# Altium PCB Pcb.pcbdoc
Units mil, origin at the board's own origin, x right, y up, seen from the top; angles counter-clockwise.
Board outline 5097.03 x 4539 mil, 2 copper layers (Top Layer, Bottom Layer); 99 components, 69 nets, 366 pads, 143 vias.
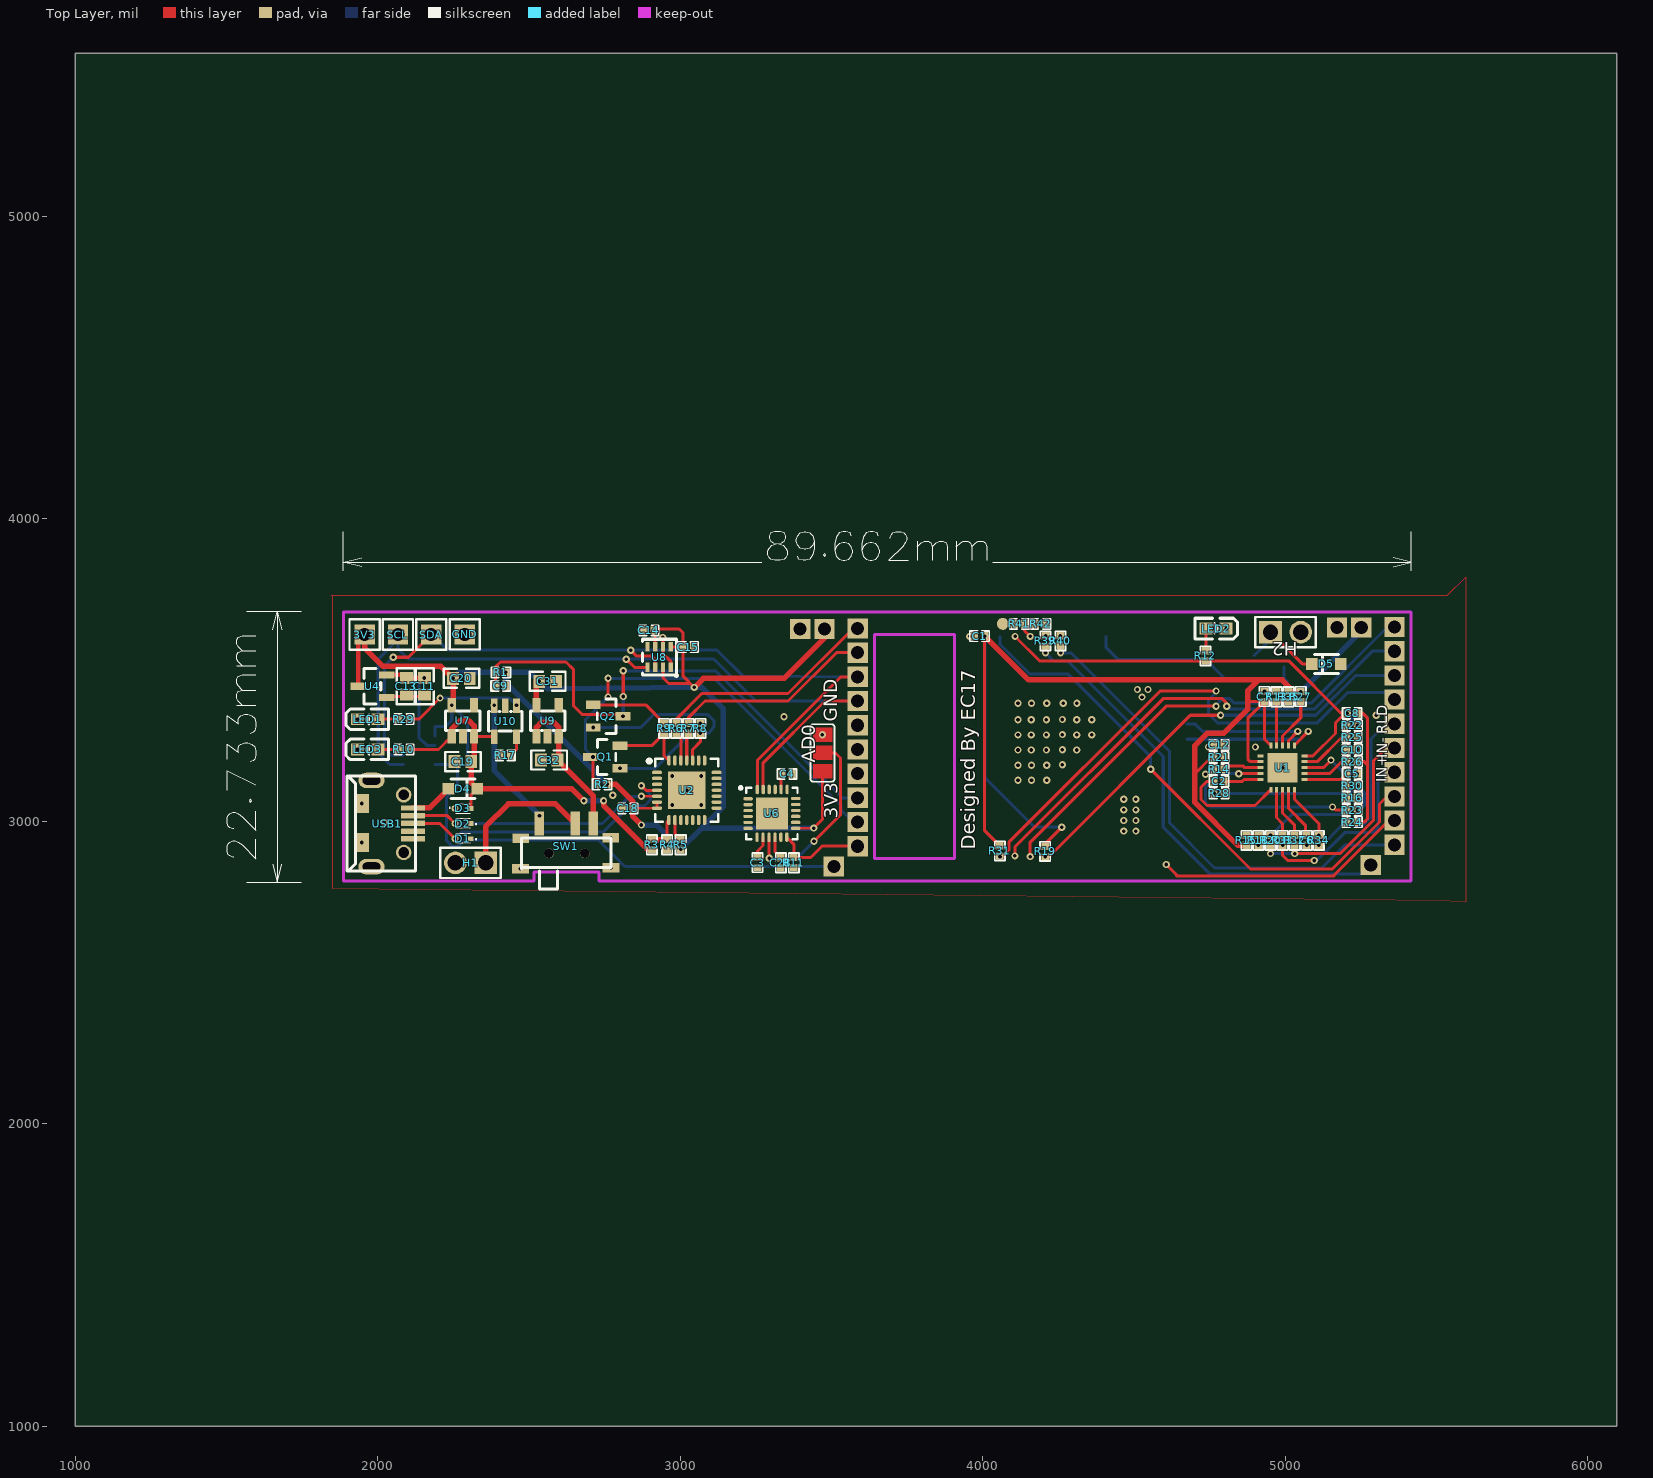
[diagram p0: Top Layer view]
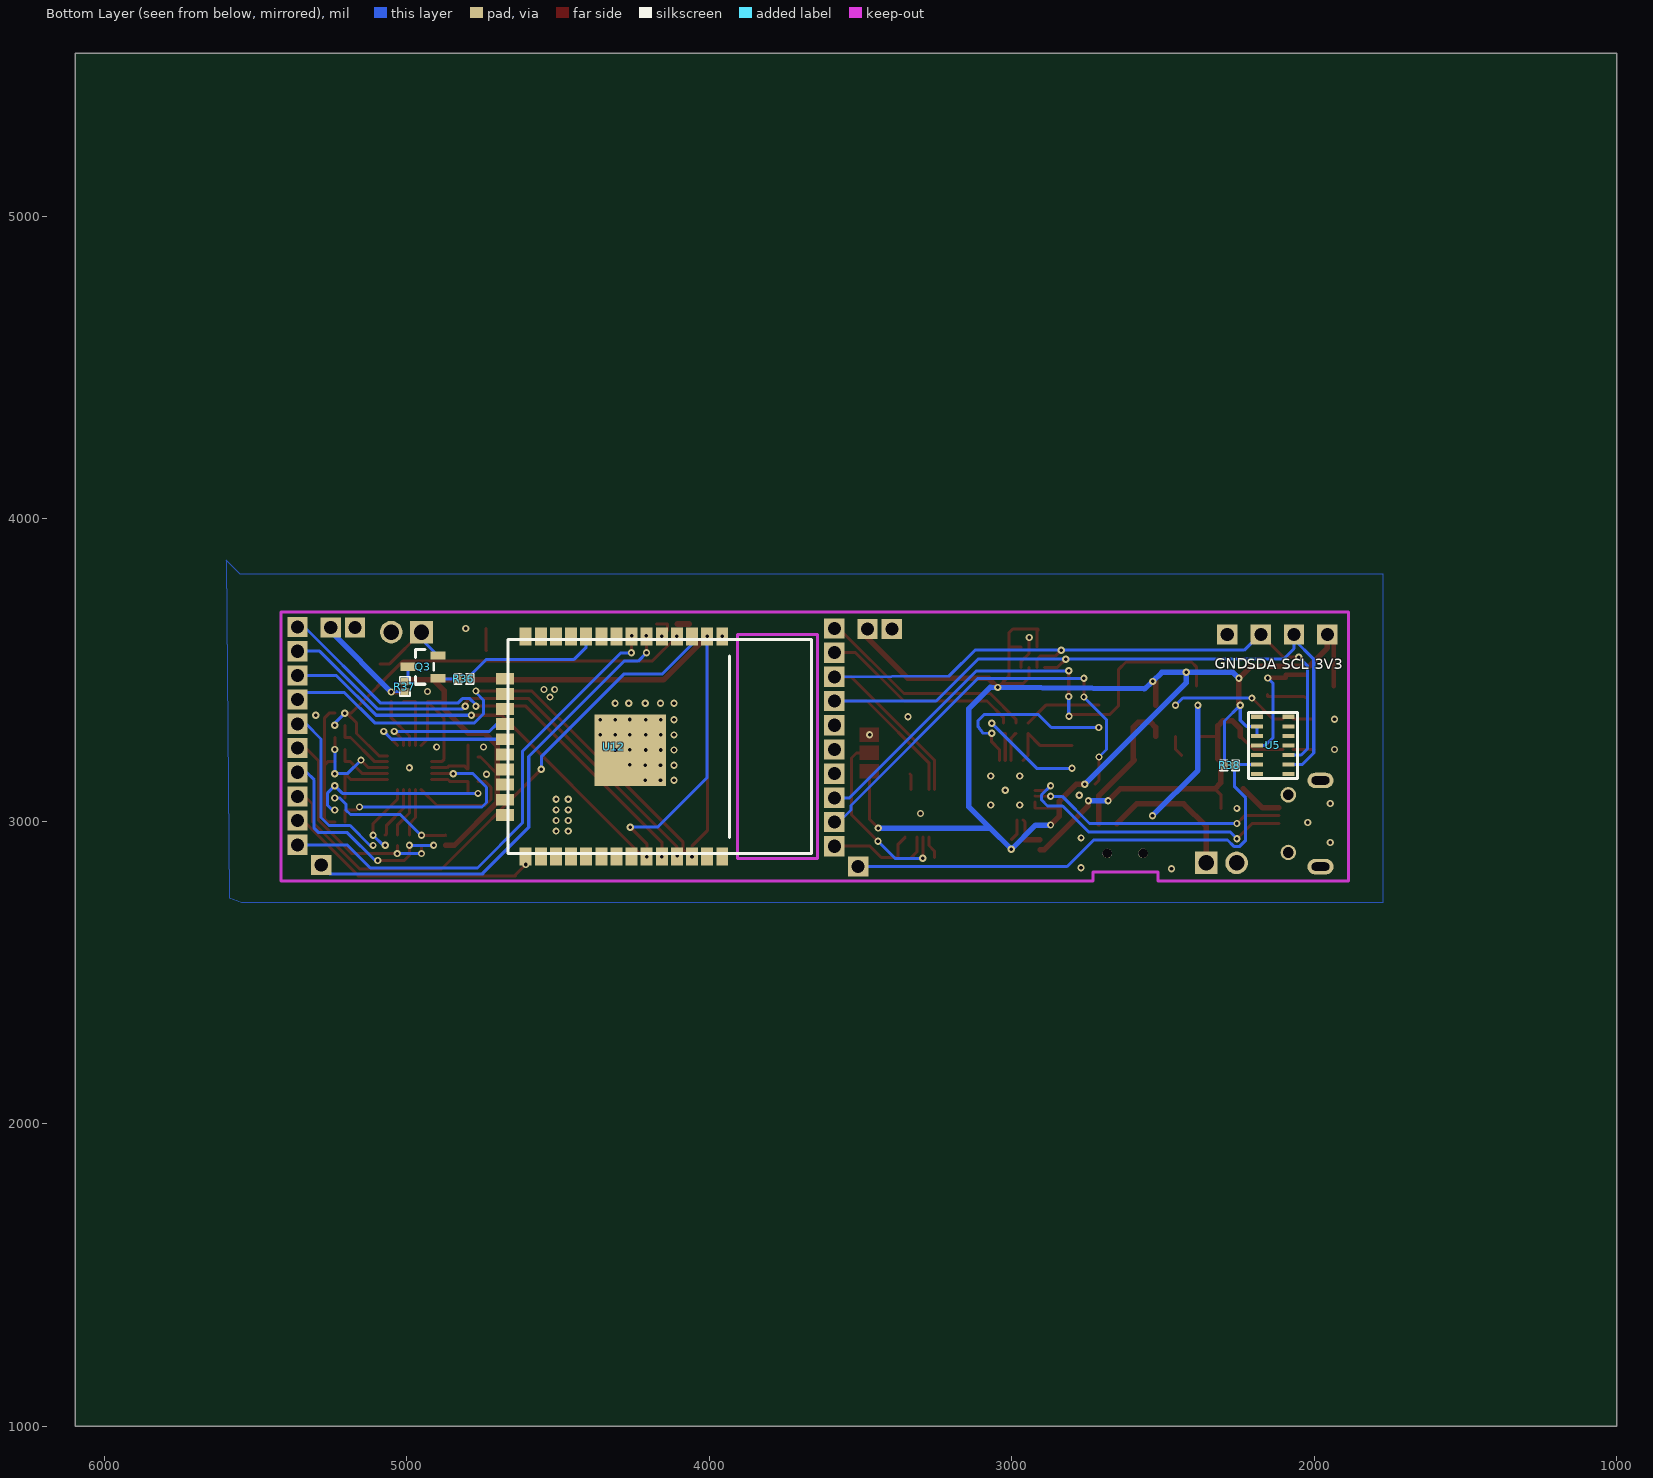
[diagram p1: Bottom Layer view, seen from below]

## Layer stack, top to bottom
Top Layer: signal copper (thickness not stored)
Dielectric: dielectric 12.6, FR-4, Dk 4.8
Bottom Layer: signal copper (thickness not stored)

## Board outline
6097.03,1000 1000,1000 1000,5539 6097.03,5539

## Components (designator, comment, footprint, x,y, rotation, side; value= is the part's Value field where it differs from the comment)
3V3 "3V3" HDR-TH_1P-P2.54-V-M 1957.03,3617 r180 top
AD0 "SJ3" SJ3 3470.93,3225.4 r90 top
C1 "100nF" 0402#1 3990.13,3611.7 r0 top
C2 "0.33uF" 0402#1 4782.03,3131.7 r0 top
C3 "10nF" 0402#1 3256.53,2862.8 r270 top
C4 "2.2nF" 0402#1 3353.53,3155.81 r0 top
C5 "0.33uF" 0402#1 5222.03,3156.7 r0 top
C6 "1nF" 0402#1 5072.03,2936.7 r90 top
C7 "0.1uF" 0402#1 4932.03,3411.7 r270 top
C8 "1.5nf" 0402#1 5222.03,3356.7 r0 top
C9 "100nF" 0402#1 2407.03,3447 r0 top
C10 "10nF" 0402#1 5222.03,3236.7 r180 top
C11 "10uF" 0603 2154.43,3445.8 r270 top
C12 "0.1uF" 0402#1 4782.03,3251.7 r0 top
C13 "10uF" 0603 2095.13,3445.8 r270 top
C14 "0.1uF" 0402#1 2897.03,3630.3 r180 top
C15 "0.1uF" 0402#1 3027.03,3575.3 r0 top
C18 "100nF" 0402#1 2827.03,3042 r180 top
C19 "10uF" 0603 2282.03,3197 r180 top
C20 "10uF" 0603 2277.03,3472 r180 top
C28 "100nF" 0402#1 3333.03,2862.3 r270 top
C31 "47uF" 0603 2562.03,3462 r180 top
C32 "47uF" 0603 2567.03,3202 r180 top
D1 "LESD5D5" LESD5D50CT1G 2282.03,2942 r180 top
D2 "LESD5D5" LESD5D50CT1G 2282.03,2992 r180 top
D3 "LESD5D5" LESD5D50CT1G 2282.03,3042 r0 top
D4 "BAT760-7" SOD-323_L1.8-W1.3-LS2.5-RD 2282.03,3107 r180 top
D5 "BAT760-7" SOD-323_L1.8-W1.3-LS2.5-RD 5137.03,3520 r0 top
GND "GND" HDR-TH_1P-P2.54-V-M 2288.03,3617.3 r180 top
H1 "Header" HDR-2X1/2.54 2307.03,2862 r270 top
H2 "Header" HDR-2X1/2.54 5002.03,3625 r90 top
IN+ "IN+" "PIN HEADER" 5362.03,3161.7 r90 top
IN- "IN-" "PIN HEADER" 5362.03,3241.7 r90 top
LED1 "19-213/R6C-AM2P1VY/3T" LED-0603 1967.03,3337 r0 top
LED2 "19-213/R6C-AM2P1VY/3T" LED-0603 4772.03,3636.7 r180 top
LED3 "19-213/R6C-AM2P1VY/3T" LED-0603 1967.03,3237 r0 top
Q1 "S8050" SOT-23(SOT-23-3)#1 2752.03,3212 r90 top
Q2 "S8050" SOT-23(SOT-23-3)#1 2762.03,3347 r270 top
Q3 "S8050" SOT-23(SOT-23-3)#2 4947.03,3510 r270 bottom
R1 "10K" 0402#1 2407.03,3492 r180 top
R2 "10K" 0402#1 2742.03,3122 r180 top
R3 "22.1K" 0402#1 2907.03,2922 r90 top
R4 "47.5K" 0402#1 2957.03,2922 r90 top
R5 "2K2" 0402#1 3002.03,2922 r90 top
R6 "1K" 0402#1 2987.03,3307 r90 top
R7 "1K" 0402#1 3027.03,3307 r90 top
R8 "10K" 0402#1 3067.03,3307 r90 top
R9 "10K" 0402#1 2947.03,3307 r90 top
R10 "1K" 0402#1 2087.03,3237 r180 top
R11 "10K" 0402#1 3376.03,2862.8 r90 top
R12 "1K" 0402#1 4737.03,3546.7 r90 top
R13 "0" 0402#1 4972.03,3411.7 r90 top
R14 "10M" 0402#1 4782.03,3171.7 r0 top
R15 "0" 0402#1 4872.03,2936.7 r90 top
R16 "DNP" 0402#1 5222.03,3076.7 r180 top
R17 "2K" 0402#1 2422.03,3217 r180 top
R18 "10M" 0402#1 4912.03,2936.7 r90 top
R19 "10K" 0402#1 4207.03,2900 r90 top
R20 "10M" 0402#1 4952.03,2936.7 r90 top
R21 "10M" 0402#1 4782.03,3211.7 r0 top
R22 "1M" 0402#1 5222.03,3316.7 r180 top
R23 "10M" 0402#1 5222.03,3036.7 r0 top
R24 "1M" 0402#1 5222.03,2996.7 r180 top
R25 "100k" 0402#1 5222.03,3276.7 r0 top
R26 "1M" 0402#1 5222.03,3196.7 r180 top
R27 "10K" 0402#1 5052.03,3411.7 r270 top
R28 "10M" 0402#1 4782.03,3091.7 r0 top
R29 "2K2" 0402#1 2087.03,3337 r180 top
R30 "1.4M" 0402#1 5222.03,3116.7 r180 top
R31 "10K" 0402#1 4057.03,2901.7 r90 top
R32 "180k" 0402#1 5032.03,2936.7 r90 top
R33 "180k" 0402#1 4992.03,2936.7 r90 top
R34 "360k" 0402#1 5112.03,2936.7 r90 top
R35 "DNP" 0402#1 5012.03,3411.7 r90 top
R36 "10K" 0402#2 4812.03,3470 r180 bottom
R37 "10K" 0402#2 5007.03,3445 r90 bottom
R38 "472" 0402#2 2280.23,3184 r0 bottom
R39 "0" 0402#1 4208.03,3596.1 r90 top
R40 "0" 0402#1 4257.23,3596.2 r90 top
R41 "47K" 0402#1 4122.03,3652 r0 top
R42 "47K" 0402#1 4192.03,3652 r180 top
RLD "RLD" "PIN HEADER" 5362.03,3321.7 r90 top
SCL "SCL" HDR-TH_1P-P2.54-V-M 2067.03,3617 r180 top
SDA "SDA" HDR-TH_1P-P2.54-V-M 2177.03,3617 r180 top
SW1 "SSSS811101" SSSS811101 2622.03,2917 r0 top
U1 "AD8232" LFCSP_20 4992.03,3176.7 r90 top
U2 "CP2102-GMR" QFN-28_5X5X05P 3022.03,3102 r0 top
U4 "CL9901A18L3M" SOT-23_L2.9-W1.3-P0.95-LS2.4-BR 1982.73,3446 r0 top
U5 "MAX30102EFD+" MAX30102 2137.03,3250.3 r180 bottom
U6 "MPU-6050_C24112" QFN-24_4X4X05P 3303.53,3025.81 r0 top
U7 "TLV70233DBVR(SOT23-5)" SEEED-SOT-23-5 2282.03,3332 r0 top
U8 "BMP280" BMP280_D 2932.03,3540.3 r90 top
U9 "TLV70233DBVR(SOT23-5)" SEEED-SOT-23-5 2562.03,3332 r0 top
U10 "MCP73832T" SOT23-5 2422.03,3330.3 r180 top
U12 "ESP-WROOM-32" ESP-WROOM-32 4317.03,3246.7 r90 bottom
USB1 "micro USBFemale" MICRO-USB-1 2032.03,2992 r180 top
? "" ? 4427.01,3269.5 r0 top
? "" ? 1624.52,3244.5 r0 top
? "" ? 3652.03,3892.15 r0 top

## Footprints (in the part's own frame and the unit in brackets; to place one, negate y for a bottom-side part, rotate by r counter-clockwise, add the part's x,y. Pads: shape width x height; smd on the part's side, far side on the other; paste and mask are expansions set on the pad)
0402#1 [mm]
  rect 0.6x0.65 smd: 1(-0.424,0) 2(0.424,0)
  silkscreen extent -0.82,-0.43 0.81,0.43
0402#2 [mm]
  rect 0.6x0.65 smd: 1(0.424,0) 2(-0.424,0)
  silkscreen extent -0.81,-0.43 0.82,0.43
0603 [mm]
  rect 1x1.1 smd: 1(-0.7,0) 2(0.7,0)
  silkscreen extent -1.5,-0.8 1.5,0.8
BMP280_D [mil]
  rect 32x13.82 smd: 1(-32,-37.2) 2(-32,-11.6) 3(-32,14.4) 4(-32,40) 5(36,40) 6(36,14.4) 7(36,-11.6) 8(36,-37.2)
  silkscreen extent -64,-61 61,56
ESP-WROOM-32 [mil]
  rect 59.1x39.4 smd: 1(364,-359.5) 2(364,-309.5) 3(364,-259.5) 4(364,-209.5) 5(364,-159.5) 6(364,-109.5) 7(364,-59.5) 8(364,-9.5) 9(364,40.5) 10(364,90.5) 11(364,140.5) 12(364,190.5) 13(364,240.5) 14(364,290.5) 25(-364,290.5) 26(-364,240.5) 27(-364,190.5) 28(-364,140.5) 29(-364,90.5) 30(-364,40.5) 31(-364,-9.5) 32(-364,-59.5) 33(-364,-109.5) 34(-364,-159.5) 35(-364,-209.5) 36(-364,-259.5) 37(-364,-309.5) 38(-364,-359.5)
  rect 39.4x59.1 smd: 15(224,359.5) 16(174,359.5) 17(124,359.5) 18(74,359.5) 19(24,359.5) 20(-26,359.5) 21(-76,359.5) 22(-126,359.5) 23(-176,359.5) 24(-226,359.5)
  rect 236.2x236.2 smd: 39(-12,-55.5)
  silkscreen extent -354,-654 354,350
HDR-2X1/2.54 [mm]
  rect 1.9x1.9 hole 1.3: 1(0,1.27)
  round 1.9 hole 1.3: 2(0,-1.27)
  silkscreen extent -1.27,-2.54 1.27,2.54
HDR-TH_1P-P2.54-V-M [mm]
  rect 1.7x1.7 hole 1.1: 1(0,0)
  silkscreen extent -1.27,-1.27 1.27,1.27
LED-0603 [mil]
  rect 43x39 smd: 1(33.5,0) 2(-33.5,0)
  silkscreen extent -72,-34 70,34
LESD5D50CT1G [mil]
  rect 18.9x15.75 smd: 1(-25.98,0) 2(25.98,0)
  silkscreen extent -45,-16 24,16
LFCSP_20 [mil]
  rect 19.7x10 smd: 1(-73,39) 2(-73,20) 3(-73,0) 4(-73,-20) 5(-73,-39) 11(73,-39) 12(73,-20) 13(73,0) 14(73,20) 15(73,39)
  rect 10x19.7 smd: 6(-39,-73) 7(-20,-73) 8(0,-73) 9(20,-73) 10(39,-73) 16(39,73) 17(20,73) 18(0,73) 19(-20,73) 20(-39,73)
  rect 98.4x98.4 smd: PAD(0,0)
MAX30102 [mil]
  rect 40x13.78 smd: 1(52.04,-94.43) 2(52.04,-62.93) 3(52.04,-31.44) 4(52.04,0.06) 5(52.04,31.54) 6(52.04,63.02) 7(52.04,94.5) 8(-51.96,94.5) 9(-51.96,63.02) 10(-51.96,31.54) 11(-51.96,0.06) 12(-51.96,-31.44) 13(-51.96,-62.93) 14(-51.96,-94.43)
  silkscreen extent -81,-109 81,110
MICRO-USB-1 [mm]
  round 1.3 hole 0.9: 0(-1.371,2.431) 0(-1.371,-2.41)
  oval 2.2x1.3 hole 0.7 slot 1.5 at 0 deg: 0(1.329,3.619) 0(1.329,-3.619)
  rect 1.2x1.6 smd: 0(2.14,-1.683) 0(2.156,1.596)
  rect 2x0.45 smd: 1(-2.156,-1.31) 2(-2.156,-0.66) 3(-2.156,-0.01) 4(-2.156,0.64) 5(-2.156,1.29)
  silkscreen extent -2.36,-4 3.4,4
"PIN HEADER" [mm]
  rect 1.7x1.7 hole 1.1: 1(0,0)
QFN-24_4X4X05P [mm]
  oval 0.8x0.28 smd: 1(-2,1.232) 2(-2,0.732) 3(-2,0.231) 4(-2,-0.267) 5(-2,-0.767) 6(-2,-1.267) 13(2,-1.257) 14(2,-0.757) 15(2,-0.257) 16(2,0.241) 17(2,0.742) 18(2,1.242)
  oval 0.28x0.8 smd: 7(-1.245,-2) 8(-0.744,-2) 9(-0.244,-2) 10(0.254,-2) 11(0.754,-2) 12(1.255,-2) 19(1.27,2) 20(0.77,2) 21(0.269,2) 22(-0.229,2) 23(-0.729,2) 24(-1.229,2)
  rect 2.68x2.68 smd: 25(0,-0.013)
  silkscreen extent -2.84,-2.16 2.15,2.35
QFN-28_5X5X05P [mm]
  oval 0.85x0.28 smd: 1(-2.5,1.501) 2(-2.5,1.001) 3(-2.5,0.5) 4(-2.5,0) 5(-2.5,-0.5) 6(-2.5,-1.001) 7(-2.5,-1.501) 15(2.5,-1.501) 16(2.5,-1.001) 17(2.5,-0.5) 18(2.5,0) 19(2.5,0.5) 20(2.5,1.001) 21(2.5,1.501)
  oval 0.28x0.85 smd: 8(-1.501,-2.5) 9(-1.001,-2.5) 10(-0.5,-2.5) 11(0,-2.5) 12(0.5,-2.5) 13(1.001,-2.5) 14(1.501,-2.5) 22(1.501,2.5) 23(1.001,2.5) 24(0.5,2.5) 25(0,2.5) 26(-0.5,2.5) 27(-1.001,2.5) 28(-1.501,2.5)
  rect 3.13x3.13 smd: 29(0,0)
  silkscreen extent -3.3,-2.65 2.65,2.65
SEEED-SOT-23-5 [mil]
  rect 27.2x47.2 smd: 1(-37,-51) 2(0,-51) 3(37,-51) 4(37,51) 5(-37,51)
  silkscreen extent -57,-32 57,32
SJ3 [mil]
  round 0 smd: 1(-60,0) 2(0,0) 3(60,0)
  Top Layer region: -23,31.5 23,31.5 23,-31.5 -23,-31.5
  Top Layer region: -83,31.5 -37,31.5 -37,-31.5 -83,-31.5
  Top Layer region: 37,31.5 83,31.5 83,-31.5 37,-31.5
  silkscreen extent -95,-40 95,40
SOD-323_L1.8-W1.3-LS2.5-RD [mm]
  rect 1x1 smd: 1(-1.2,0) 2(1.2,0)
  silkscreen extent -1,-0.8 1,0.8
SOT23-5 [mil]
  rect 21.7x47.2 smd: 1(-37,-51) 2(0,-51) 3(37,-51) 4(37,51) 5(-37,51)
  silkscreen extent -56,-32 56,32
SOT-23(SOT-23-3)#1 [mm]
  rect 0.7x1.25 smd: 1(-0.95,-1.25) 2(0.95,-1.25) 3(0,1.25)
  silkscreen extent -1.46,-0.9 1.46,0.65
SOT-23(SOT-23-3)#2 [mm]
  rect 0.7x1.25 smd: 1(0.95,1.25) 2(-0.95,1.25) 3(0,-1.25)
  silkscreen extent -1.46,-0.65 1.46,0.9
SOT-23_L2.9-W1.3-P0.95-LS2.4-BR [mm]
  rect 1.3x0.6 smd: 1(1.2,-0.95) 2(1.2,0.95) 3(-1.2,0)
  silkscreen extent -0.7,-1.5 0.7,1.5
SSSS811101 [mm]
  rect 0.8x2 smd: 1(-2.209,1.898) 2(0.791,1.898) 3(2.291,1.898)
  rect 1.4x0.8 smd: 4(-3.793,0.688) 5(3.79,0.697) 6(3.802,-1.812) 7(-3.802,-1.898)
  round 0.8 hole 0.8 unplated: ""(-1.413,-0.597) ""(1.589,-0.599)
  silkscreen extent -3.71,-3.6 3.79,0.7
? [mil]

## Free pads (board coordinates)
  rect 66.93x66.93 hole 43.31: 3(3587.03,3637) 3(5362.03,3641.7) 4(3587.03,3477) 4(5362.03,3481.7) 5(3587.03,3557) 5(5362.03,3561.7) 6(3587.03,2997) 6(5362.03,3001.7) 7(3587.03,3317) 7(5362.03,3321.7) 8(3587.03,3157) 8(5362.03,3161.7) 9(3587.03,3237) 9(5362.03,3241.7) 10(3508.33,2849.9) 10(3587.03,2917) 10(5283.33,2854.6) 10(5362.03,2921.7) 12(3397.03,3635.3) 12(3477.03,3635.3) 12(5172.03,3640) 12(5252.03,3640) 13(3587.03,3077) 13(5362.03,3081.7) 15(3587.03,3397) 15(5362.03,3401.7)
  round 39.4 smd: "0402 Resistor"(4067.03,3652)

## Via types
v1: diameter 24, hole 12, Top Layer to Bottom Layer, tented both sides, 143 vias

## Nets (pads, with @x,y where several pads share a name; then routed paths per layer and width w, separated by ;. In a path a pad name is that pad's centre, name@x,y a point inside that pad or via, vN(x,y) a via of type N, cw(c..) or ccw(c..) an arc to the next point about the centre after c; other vN are vias at no path point)
1V8: C11.1 C13.1 U4.2 U5.11 | length 402.1
  Top Layer w15: U4.2@2029.93,3483.4 2095.14,3483.4 C13.1 ; C13.1 v1(2154.43,3473.36)
  Bottom Layer w10: v1(2154.43,3473.36) 2137.03,3456 2137.03,3275.3 2161.93,3250.4 U5.11
3V3: 3V3.1 AD0.1 C1.2 C7.2 C14.1 C15.1 C18.1 C20.2 C31.2 pad.12@3477.03,3635.3 pad.12@5252.03,3640 R1.1 R2.1 R5.1 R15.1 R19.2 R21.1 R27.1 R31.2 R35.2 R37.2 R38.1 U1.15 U1.17 U2.6 U2.7 U4.3 U5.9 U5.10 U6.13 U7.5 U8.2 U8.6 U8.8 U9.5 U12.2 | length 9618
  Top Layer w10: C18.1 U2.7 ; U8.6 2917.64,3626.4 C14.1 2913.73,3635.3 2997.03,3635.3 3010.34,3622 C15.1 ; U2.7 U2.6 ; U8.2 2943.63,3473.7 2962.03,3455.3 3033.73,3455.3 v1(3047.03,3442) 3010.34,3478.7 C15.1 ; U8.8 2970.24,3575.3 C15.1 ; U6.13@3382.23,2976.3 v1(3442.03,2977) 3470.93,3005.9 AD0.1 ; v1(4007.03,3611.7) C1.2 4006.83,2968.6 R31.2 ; R19.2 4207.03,2925 v1@4257.03,2975 ; 4702.03,3156.7 4757.03,3211.7 R21.1 ; 4877.03,3395 C7.2 ; U1.17 4885.34,3196.7 4877.03,3205 4877.03,3340 C7.2 ; U1.15 4932.03,3270.7 C7.2
  Top Layer w15: U4.3 1935.48,3595.45 3V3.1
  Top Layer w18: 3V3.1 1957.03,3572.7 2017.73,3512 2209.43,3512 2249.43,3472 2249.47,3387.44 v1(2245.03,3383) ; U9.5 2525.03,3462 v1(2534.48,3462) ; v1(2758.73,3122) 2787.03,3122 2843.73,3065.3 C18.1 2843.73,3015.3 v1(2872.03,2987) ; v1(3047.03,3442) 3077.03,3472 3343.73,3472 3477.03,3605.3 pad.12@3477.03,3635.3 ; C1.2 4151.83,3466.7 4990.33,3466.7 5012.03,3445 R35.2 R27.1 ; R15.1 4843.73,2920 4702.03,3061.7 4702.03,3156.7 4702.03,3250 4742.03,3290 4797.03,3290 4877.03,3370 4877.03,3431.69 4912.05,3466.7
  Bottom Layer w10: U5.10 U5.9 2225.05,3313.32 2245.03,3333.3 v1(2245.03,3383) 2296.93,3331.1 R38.1 ; U12.2 4007.53,3144.5 4172.03,2980 v1(4262.03,2980) ; R37.2 5050.44,3428.3 v1(5052.03,3426.7)
  Bottom Layer w18: v1(2249.47,3472) 2269.47,3492 v1(2423.73,3492) ; v1(2758.73,3122) 2423.73,3457 v1(2423.73,3492) ; v1(2872.03,2987) 2922.03,2987 v1(3002.03,2907) 3072.03,2977 ; v1(3442.03,2977) 3072.03,2977 ; v1(5052.03,3426.7) 5252.03,3626.7 pad.12@5252.03,3640 ; v1(2423.73,3492) 2504.53,3492 v1(2534.48,3462) 2562.03,3437 3072.03,3442 3142.03,3372 3142.03,3047 3072.03,2977
+5V: C19.1 D3.2 D4.1 R3.1 R10.1 U7.1 U7.3 U10.4 | length 1306.4
  Top Layer w10: R10.1 2201.03,3237 U7.1 ; D3.2 2308.01,3085.74 D4.1 ; U7.3 2320.73,3279.3 U10.4
  Top Layer w18: U7.1 2245.03,3305 2272.03,3332 2302.03,3332 2319.03,3315 U7.3 2319.03,3206.44 C19.1 2309.59,3126.68 D4.1 ; D4.1 2642.03,3107 v1(2682.03,3067) ; v1(2747.03,3067) 2747.03,3052 2893.73,2905.3 R3.1
  Bottom Layer w18: v1(2682.03,3067) v1(2747.03,3067)
C3_1: C3.1 U6.8 | length 74.9
  Top Layer w10: C3.1 3256.53,2901.4 3274.23,2919.1 U6.8
C4_1: C4.1 U6.20 | length 52.5
  Top Layer w10: U6.20@3333.83,3104.55 3333.83,3152.82 C4.1
C8_2: C8.2 R24.1 R26.1 | length 449.4
  Top Layer w10: R24.1 5262.03,2996.7 5272.03,3006.7 5272.03,3186.7 ; R26.1 5262.03,3196.7 5272.03,3186.7 ; C8.2 5257.03,3356.7 5272.03,3341.7 5272.03,3186.7
C28_1: C28.1 U6.10 | length 76.1
  Top Layer w10: U6.10 3313.53,2898.49 C28.1
EN: C9.1 pad.13 Q2.3 R1.2 U12.3 | length 3531.4
  Top Layer w10: C9.1 R1.2 2390.34,3510.3 2406.03,3526 2623.03,3526 2647.03,3502 2647.03,3382 2677.03,3352 2806.23,3352 v1(2811.23,3347) ; v1(2812.03,3412) v1(2812.03,3497) ; v1(4555.93,3171.7) 4885.93,2841.7 5156.53,2841.7 5312.03,2997.2 5312.03,3056.7 5337.03,3081.7 pad.13@5362.03,3081.7
  Bottom Layer w10: v1(2811.23,3347) 2812.03,3347.8 v1(2812.03,3412) ; v1(2812.03,3497) 3117.03,3497 3537.03,3077 pad.13@3587.03,3077 ; U12.3 4057.53,3584.5 4155.03,3487 4282.13,3487 4555.93,3213.2 v1(4555.93,3171.7)
GND: AD0.3 C1.1 C3.2 C4.2 C7.1 C9.2 C11.2 C12.1 C13.2 C14.2 C15.2 C18.2 C19.2 C20.1 C28.2 C31.1 C32.2 D1.1 D2.1 D3.1 D5.2 GND.1 H1.2 H2.2 LED1.2 LED2.2 LED3.2 pad.12@3397.03,3635.3 pad.12@5172.03,3640 R4.1 R11.1 R13.2 R14.1 R17.2 R42.1 SW1.4 SW1.5 SW1.6 SW1.7 U1.16 U1.PAD U2.3 U2.29 U4.1 U5.4 U5.12 U6.1 U6.11 U6.18 U6.25 U7.2 U8.1 U8.5 U8.7 U9.2 U10.2 U12.1 U12.15 U12.38 U12.39 USB1.0 USB1.5 | length 241.8
  Top Layer w10: U4.1@2029.93,3408.6 2033.63,3412.3 2154.43,3412.3 C11.2 ; v1(2943.03,3607.3) 2943.63,3606.7 U8.7 2943.63,3553.7 2969.23,3528.1 U8.1
  other v1: 2472.33,2842.27 2771.73,2845.65 1947.15,2929.18 2771.25,2944.44 4467.03,2967 4507.03,2967 2022.03,2995.3 4467.03,3002 4507.03,3002 3302.03,3025.3 4467.03,3037 4507.03,3037 2256.05,3042 2974.03,3053.3 3070.03,3053.3 1947.79,3058.26 4467.03,3072 4507.03,3072 2777.03,3085.3 3022.03,3102 4117.03,3135 4162.03,3135 4212.03,3135 2974.03,3149.3 3070.03,3149.3 4737.03,3155 4992.03,3176.7 4117.03,3185 4162.03,3185 4212.03,3185 4264.03,3186 4117.03,3235 4161.03,3235 4211.03,3235 4311.03,3235 4264.03,3236 1933.53,3237 4747.03,3245 4902.03,3245 3470.43,3285.2 4117.03,3285 4161.03,3285 4211.03,3285 4311.03,3285 4361.03,3285 4264.03,3286 4117.03,3335 4161.03,3335 4211.03,3335 4311.03,3335 4361.03,3335 4264.03,3336 1933.53,3337 3343.53,3345.4 5302.03,3350 4117.03,3390 4162.03,3390 4212.03,3390 4267.03,3390 4312.03,3390 4527.03,3410 4932.03,3428.4 4512.03,3435 4547.03,3435 3957.53,3610.7 4805.53,3636.7
INTH: pad.10@3508.33,2849.9 pad.10@5283.33,2854.6 R38.2 R39.1 U5.13 | length 3223.7
  Top Layer w10: v1(4207.93,3556.7) 4208.03,3556.8 R39.1
  Bottom Layer w10: U5.13 2263.53,3187.4 R38.2 2263.53,3113.2 2227.13,3076.8 2227.13,2936.3 2246.63,2916.8 2266.23,2916.8 2287.13,2937.7 2729.53,2937.7 2817.33,2849.9 pad.10@3508.33,2849.9 ; v1(4207.93,3556.7) 4235.73,3528.9 4282.53,3528.9 4597.43,3214 4597.43,2979.5 4749.43,2827.5 ; 4749.43,2824.5 pad.10@5256.23,2824.5 ; pad.10@5256.23,2827.5 pad.10@5283.33,2854.6
INTM: pad.10@3587.03,2917 pad.10@5362.03,2921.7 R11.2 R40.1 U6.12 | length 1895.4
  Top Layer w10: U6.12 3376.03,2924 R11.2 3431.63,2879.5 3469.13,2917 pad.10@3587.03,2917 ; R40.1 v1(4258.03,3556.5)
  Bottom Layer w10: v1@4258.03,3555.6 4293.23,3555.6 4618.63,3230.1 4618.63,2993.5 4767.13,2845 5121.33,2845 5198.03,2921.7 pad.10@5362.03,2921.7
IO0: pad.6 Q1.3 R2.2 U12.25 | length 2271.5
  Top Layer w10: v1(2712.03,3212) 2712.03,3135.3 R2.2 ; v1(2762.03,3410.3) v1(2762.03,3472) ; v1(4607.03,2856.7) 4642.03,2821.7 ; 4642.03,2818.7 5162.64,2818.7 ; 5162.64,2821.7 5342.64,3001.7 pad.6@5362.03,3001.7
  Bottom Layer w10: v1(2712.03,3212) 2687.03,3237 2687.03,3335.3 v1(2762.03,3410.3) ; v1(2762.03,3472) 3112.03,3472 3532.03,3052 3532.03,3037 3572.03,2997 pad.6@3587.03,2997
IO10: U1.12 U12.18 | length 434.9
  Top Layer w10: U1.12 5012.03,3266.7 v1(5042.03,3296.7)
  Bottom Layer w10: U12.18 4703.03,3320.7 4727.03,3296.7 v1(5042.03,3296.7)
IO11: U1.11 U12.19 | length 477.3
  Top Layer w10: U1.11 5031.03,3250.7 v1(5077.03,3296.7)
  Bottom Layer w10: U12.19 5051.03,3270.7 v1(5077.03,3296.7)
IO25: R36.1 U12.10 | length 471.2
  Bottom Layer w10: U12.10 4407.53,3574.5 4447.03,3535 4737.03,3535 4795.34,3476.7 R36.1
IO36: C8.1 R12.1 R22.1 U1.10 U12.4 | length 1476.1
  Top Layer w10: v1(4107.53,3610.7) 4188.23,3530 R12.1 5012.03,3530 5185.34,3356.7 v1(5205.33,3356.7) 5198.73,3356.7 5167.03,3325 5167.03,3290 5092.73,3215.7 U1.10
  Bottom Layer w10: v1(5205.33,3356.7) 5238.73,3323.3 v1(5238.73,3316.7)
IO39: R41.2 R42.2 U12.5 | length 85.7
  Top Layer w10: v1(4157.53,3610.7) 4138.73,3629.5 R41.2 R42.2
LED3_1: LED3.1 R10.2 | length 69.8
  Top Layer w10: LED3.1 R10.2
Q1_1: Q1.1 R8.2 | length 327.6
  Bottom Layer w10: v1(2801.23,3174.6) 2917.93,3174.6 v1(3067.03,3323.7)
Q2_1: Q2.1 R9.2 | length 259.3
  Top Layer w10: Q2.1 2886.33,3384.4 R9.2
Q3_2: D5.1 H2.1 Q3.2 | length 281.3
  Top Layer w10: H2.1 5057.03,3520 D5.1
  Bottom Layer w10: Q3.2 4952.03,3601.6 H2.1
Q3_3: Q3.3 R37.1 | length 52.8
  Bottom Layer w10: Q3.3 4996.23,3472.5 R37.1
R12_2: LED2.1 R12.2 | length 73.9
  Top Layer w10: R12.2 4738.53,3564.9 LED2.1
R15_2: R15.2 R16.1 R18.2 R20.2 | length 432.3
  Top Layer w10: R15.2 4873.73,2951.7 4952.03,2951.7 R20.2
  Bottom Layer w10: v1@4952.03,2951.7 5022.03,3021.7 5187.03,3021.7 5202.03,3036.7 5202.03,3056.7 5221.83,3076.5 v1(5238.53,3076.5)
  other v1: 4952.03,2953.7
R18_1: IN+.1 pad.8 R18.1 R33.1 | length 706.7
  Top Layer w10: pad.8@3587.03,3157 pad.8@3588.73,3157 ; v1(4992.03,2920) 4992.03,2886.7 5009.03,2869.7 v1(5097.03,2869.7)
  Bottom Layer w10: v1(4912.03,2920) v1(4992.03,2920) ; v1(5097.03,2869.7) 5105.03,2869.7 5197.03,2961.7 5292.03,2961.7 5307.03,2976.7 5307.03,3136.7 5332.03,3161.7 IN+.1
R20_1: IN-.1 pad.9 R20.1 R32.1 | length 724.6
  Top Layer w10: v1(4952.03,2892.7) R20.1 ; R32.1 v1(5032.03,2892.7) 5183.03,2892.7 5292.03,3001.7 5292.03,3198.7 5335.03,3241.7 IN-.1
  Bottom Layer w10: v1(4952.03,2892.7) v1(5032.03,2892.7)
R23_2: R23.2 R28.1 R30.1 | length 587.9
  Bottom Layer w10: v1(4765.33,3091.7) 5213.73,3091.7 v1(5238.73,3116.7) 5262.03,3093.4 5262.03,3051.7 5247.03,3036.7 v1(5238.73,3036.7)
R29_1: R29.1 U10.1 | length 394.2
  Top Layer w10: R29.1 2136.63,3337 v1(2206.43,3406.8)
  Bottom Layer w10: v1(2206.43,3406.8) 2246.43,3406.8 2246.63,3407 2435.03,3407 v1(2459.03,3383)
R29_2: LED1.1 R29.2 | length 69.8
  Top Layer w10: LED1.1 R29.2
R34_1: pad.7 R34.1 RLD.1 | length 568.8
  Bottom Layer w10: v1(5112.03,2919.7) 5122.03,2919.7 5188.03,2985.7 5258.03,2985.7 5284.03,3011.7 5284.03,3271.7 5334.03,3321.7 RLD.1
R36_2: Q3.1 R36.2 | length 70.2
  Bottom Layer w10: R36.2 4895.23,3470 Q3.1
REFOUT: C5.2 C10.1 R25.2 U1.8 | length 322.7
  Top Layer w10: U1.8 5127.03,3176.7 v1(5152.03,3201.7) ; v1(5238.73,3236.7) R25.2
  Bottom Layer w10: v1(5152.03,3201.7) 5197.03,3156.7 v1(5238.73,3156.7) v1(5238.73,3236.7)
RX: pad.3 R6.2 U12.34 | length 2299.8
  Top Layer w10: R6.2 2987.03,3337 3072.03,3422 3357.03,3422 3572.03,3637 pad.3@3587.03,3637 ; v1(4157.53,2882.7) 4157.53,2930.5 4607.03,3380 v1(4772.03,3380)
  Bottom Layer w10: v1(4772.03,3380) 4772.03,3385 4792.03,3405 4817.03,3405 4832.03,3390 5087.03,3390 5338.73,3641.7 pad.3@5362.03,3641.7
RXD: R7.1 U2.25 | length 94.9
  Top Layer w10: U2.25 3022.03,3290.3 R7.1
S$67: 
S$69: 
S$24667: 
S$25331: 
SCL: pad.15 R31.1 SCL.1 U5.2 U6.23 U8.4 U12.36 | length 4455.1
  Top Layer w10: v1(2822.03,3535.3) 2849.03,3508.3 U8.4 ; U6.23@3274.83,3104.5 3274.83,3193.1 3478.73,3397 pad.15@3587.03,3397 ; R31.1 4067.03,2885 4087.03,2905 4087.03,2930 4587.03,3430 v1(4772.03,3430)
  Bottom Layer w10: U5.2 2039.96,3187.37 2002.03,3225.3 2002.03,3535.3 2067.03,3600.3 SCL.1 2067.03,3570.3 2101.33,3536 2796.8,3536 3111.33,3536 3250.34,3397 pad.15@3587.03,3397 ; v1(4772.03,3430) 4772.03,3425 4747.03,3400 4747.03,3355 4777.03,3325 5107.03,3325 5207.03,3425 5362.03,3425 pad.15@5362.03,3401.7
  other v1: 4057.53,2882.7
SDA: pad.4 R19.1 SDA.1 U5.3 U6.24 U8.3 U12.33 | length 4074.8
  Top Layer w10: v1(2051.73,3541.8) 2101.83,3541.8 SDA.1 ; v1(2837.03,3565.3) 2857.03,3545.3 2907.03,3545.3 2917.64,3534.7 U8.3 ; U6.24@3255.14,3104.55 3255.14,3200.1 3532.03,3477 pad.4@3587.03,3477 ; R19.1 4220.33,2883.3 4687.03,3350 v1(4787.03,3350)
  Bottom Layer w10: v1(2051.73,3541.8) 2022.03,3512.1 2022.03,3240.3 2043.43,3218.9 U5.3 ; SDA.1@2177.03,3620.3 2232.03,3565.3 v1(2837.03,3565.3) 3122.03,3565.3 3207.03,3480.3 pad.4@3587.03,3477 ; v1(4787.03,3350) 5102.03,3350 5233.73,3481.7 pad.4@5362.03,3481.7
  other v1: 4207.53,2882.7
SW1_2: "pad.0402 Resistor" H1.1 R41.1 SW1.2 | length 512.5
  Top Layer w18: H1.1 2357.03,2982 2432.03,3057 2587.89,3057 SW1.2
  Top Layer w20: 4067.03,3652 R41.1
TX: pad.5 R7.2 U12.35 | length 2255.1
  Top Layer w10: R7.2 3027.03,3342 3082.03,3397 3357.03,3397 3517.03,3557 pad.5@3587.03,3557 ; v1(4107.03,2885) 4107.03,2915 4597.03,3405 4792.03,3405 4807.03,3390 v1(4807.03,3380)
  Bottom Layer w10: v1(4807.03,3380) 4817.03,3370 5097.03,3370 5288.73,3561.7 pad.5@5362.03,3561.7
TXD: R6.1 U2.26 | length 96.2
  Top Layer w10: R6.1 3002.33,3275 U2.26
U1_1: C2.1 U1.1 | length 352.4
  Top Layer w10: C2.1 4742.03,3131.7 4722.03,3111.7 4722.03,3071.7 4742.03,3051.7 4901.03,3051.7 U1.1
U1_2: R33.2 U1.2 | length 158.6
  Top Layer w10: U1.2 4972.03,3011.7 4992.03,2991.7 R33.2
U1_3: R32.2 U1.3 | length 166.9
  Top Layer w10: U1.3 4992.03,3026.7 5032.03,2986.7 R32.2
U1_4: C6.2 U1.4 | length 175.2
  Top Layer w10: U1.4 5012.03,3041.7 5067.03,2986.7 5067.03,2958.4 C6.2
U1_5: C6.1 R34.2 U1.5 | length 237.7
  Top Layer w10: U1.5 5031.03,3072.7 5112.03,2991.7 v1(5112.03,2953.4)
  Bottom Layer w10: v1(5072.03,2920) 5078.63,2920 v1(5112.03,2953.4)
U1_6: C5.1 R16.2 R30.2 U1.6 | length 228.2
  Top Layer w10: U1.6 5186.33,3137.7 C5.1 R16.2
U1_7: C10.2 R26.2 U1.7 | length 196.9
  Top Layer w10: U1.7 5147.03,3156.7 5187.03,3196.7 R26.2 C10.2
U1_9: R22.2 R25.1 U1.9 | length 213.4
  Top Layer w10: U1.9 5107.03,3196.7 5187.03,3276.7 R25.1 R22.2
U1_13: R27.2 U1.13 | length 170.2
  Top Layer w10: U1.13 4992.03,3281.7 5052.03,3341.7 R27.2
U1_14: R13.1 R35.1 U1.14 | length 185.3
  Top Layer w10: U1.14 R13.1 R35.1
U1_18: C12.2 R14.2 R21.2 U1.18 | length 206.5
  Top Layer w10: C12.2 R14.2 4808.73,3181.7 4862.03,3181.7 4867.03,3176.7 U1.18
U1_19: R23.1 R24.2 U1.19 | length 769.3
  Top Layer w10: v1(4847.03,3156.7) U1.19 ; v1(5157.03,3046.7) 5167.03,3036.7 R23.1 R24.2
  Bottom Layer w10: v1(4847.03,3156.7) 4782.03,3156.7 4737.03,3111.7 4737.03,3061.7 4752.03,3046.7 v1(5157.03,3046.7)
U1_20: C2.2 R28.2 U1.20 | length 162.8
  Top Layer w10: R28.2 C2.2 4858.73,3131.7 4864.73,3137.7 U1.20
U2_4: D1.2 U2.4 USB1.3 | length 976.1
  Top Layer w10: USB1.3 2205.64,2992.41 v1(2256.05,2942) ; v1(2872.03,3117) 2887.03,3102 U2.4
  Bottom Layer w10: v1@2256.03,2942 2278.73,2964.7 2746.43,2964.7 2832.03,3050.3 2882.03,3050.3 2902.03,3070.3 2902.03,3087 v1(2872.03,3117)
U2_5: D2.2 U2.5 USB1.2 | length 854.8
  Top Layer w10: USB1.2 2230.05,3018 v1(2256.05,2992) ; v1(2872.03,3082) U2.5
  Bottom Layer w10: v1@2256.03,2992 2743.73,2992 2833.73,3082 v1(2872.03,3082)
U2_8: R3.2 R4.2 U2.8 | length 117.3
  Top Layer w10: R4.2 2957.03,2997.67 U2.8
  Top Layer w18: R3.2 R4.2
U2_9: R5.2 U2.9 | length 72.9
  Top Layer w10: U2.9 2982.64,2958.1 R5.2
U2_24: Q2.2 R8.1 U2.24 | length 600.5
  Top Layer w10: U2.24 3041.73,3236.7 3067.03,3262 v1(3067.03,3290.3)
  Bottom Layer w10: v1(2712.83,3309.6) 2869.63,3309.6 2912.03,3352 3092.03,3352 3112.03,3332 3112.03,3312 3097.03,3292 v1(3067.03,3290.3)
U2_28: Q1.2 R9.1 U2.28 | length 259.2
  Top Layer w10: Q1.2 2906.13,3249.4 R9.1 2947.03,3216.32 U2.28
U6_9: AD0.2 U6.9 | length 620.4
  Top Layer w10: U6.9 3293.93,2877.5 v1(3294.43,2877) ; v1(3442.63,2933.1) 3530.53,3021 3530.53,3209 3514.13,3225.4 AD0.2
  Bottom Layer w10: v1(3294.43,2877) 3386.53,2877 v1(3442.63,2933.1)
U10_5: R17.1 U10.5 | length 70.7
  Top Layer w10: R17.1 2459.03,3237.3 U10.5
U12_6: R39.2 U12.6
  other v1: 4208.33,3612.8
U12_7: R40.2 U12.7
  other v1: 4257.23,3612.9
USB1_1: D4.2 USB1.1 | length 144.2
  Top Layer w18: USB1.1 2171.42,3043.59 D4.2
VCC: C32.1 SW1.3 U9.1 U9.3 | length 485.9
  Top Layer w18: U9.1 2525.03,3310 2542.03,3327 2582.03,3327 2599.03,3310 U9.3 2599.03,3206.44 C32.1 2712.22,3084.38 SW1.3
VCC1: SW1.1 U10.3 | length 427.1
  Bottom Layer w18: v1(2385.03,3383) 2385.03,3168 v1(2535.03,3018)
pads on no net: SW1. U2.1 U2.2 U2.10 U2.11 U2.12 U2.13 U2.14 U2.15 U2.16 U2.17 U2.18 U2.19 U2.20 U2.21 U2.22 U2.23 U2.27 U5.1 U5.5 U5.6 U5.7 U5.8 U5.14 U6.2 U6.3 U6.4 U6.5 U6.6 U6.7 U6.14 U6.15 U6.16 U6.17 U6.19 U6.21 U6.22 U7.4 U9.4 U12.8 U12.9 U12.11 U12.12 U12.13 U12.14 U12.16 U12.17 U12.20 U12.21 U12.22 U12.23 U12.24 U12.26 U12.27 U12.28 U12.29 U12.30 U12.31 U12.32 U12.37 USB1.4

## Polygon pours and split planes (outlines as drawn)
GND on Bottom Layer (solid): 1772.03,2732 1772.03,3817 5552.03,3817 5597.03,3862 5587.03,2747 5547.03,2732
GND on Top Layer (solid): 1852.03,2777 1852.03,3742 1847.03,3747 5537.03,3747 5597.03,3807 5597.03,2732 5522.03,2737

## Silkscreen, mask and mechanical layers (free items; w line width, h text height)
Top Overlay:
  text "GND" at 3519.13,3329.1 h45 r90
  text "3V3" at 3520.43,3007.6 h45 r90
  text "Designed By EC17" at 3992.03,2904.6 h80 r90